# Altium PCB ADCS C2Sv0.1 - Shield.PcbDoc
Units mm, origin at the board's own origin, x right, y up, seen from the top; angles counter-clockwise.
Board outline 76 x 57 mm, 2 copper layers (Top Layer, Bottom Layer), stack 1.57 mm thick; 13 components, 11 nets, 66 pads, 8 vias.
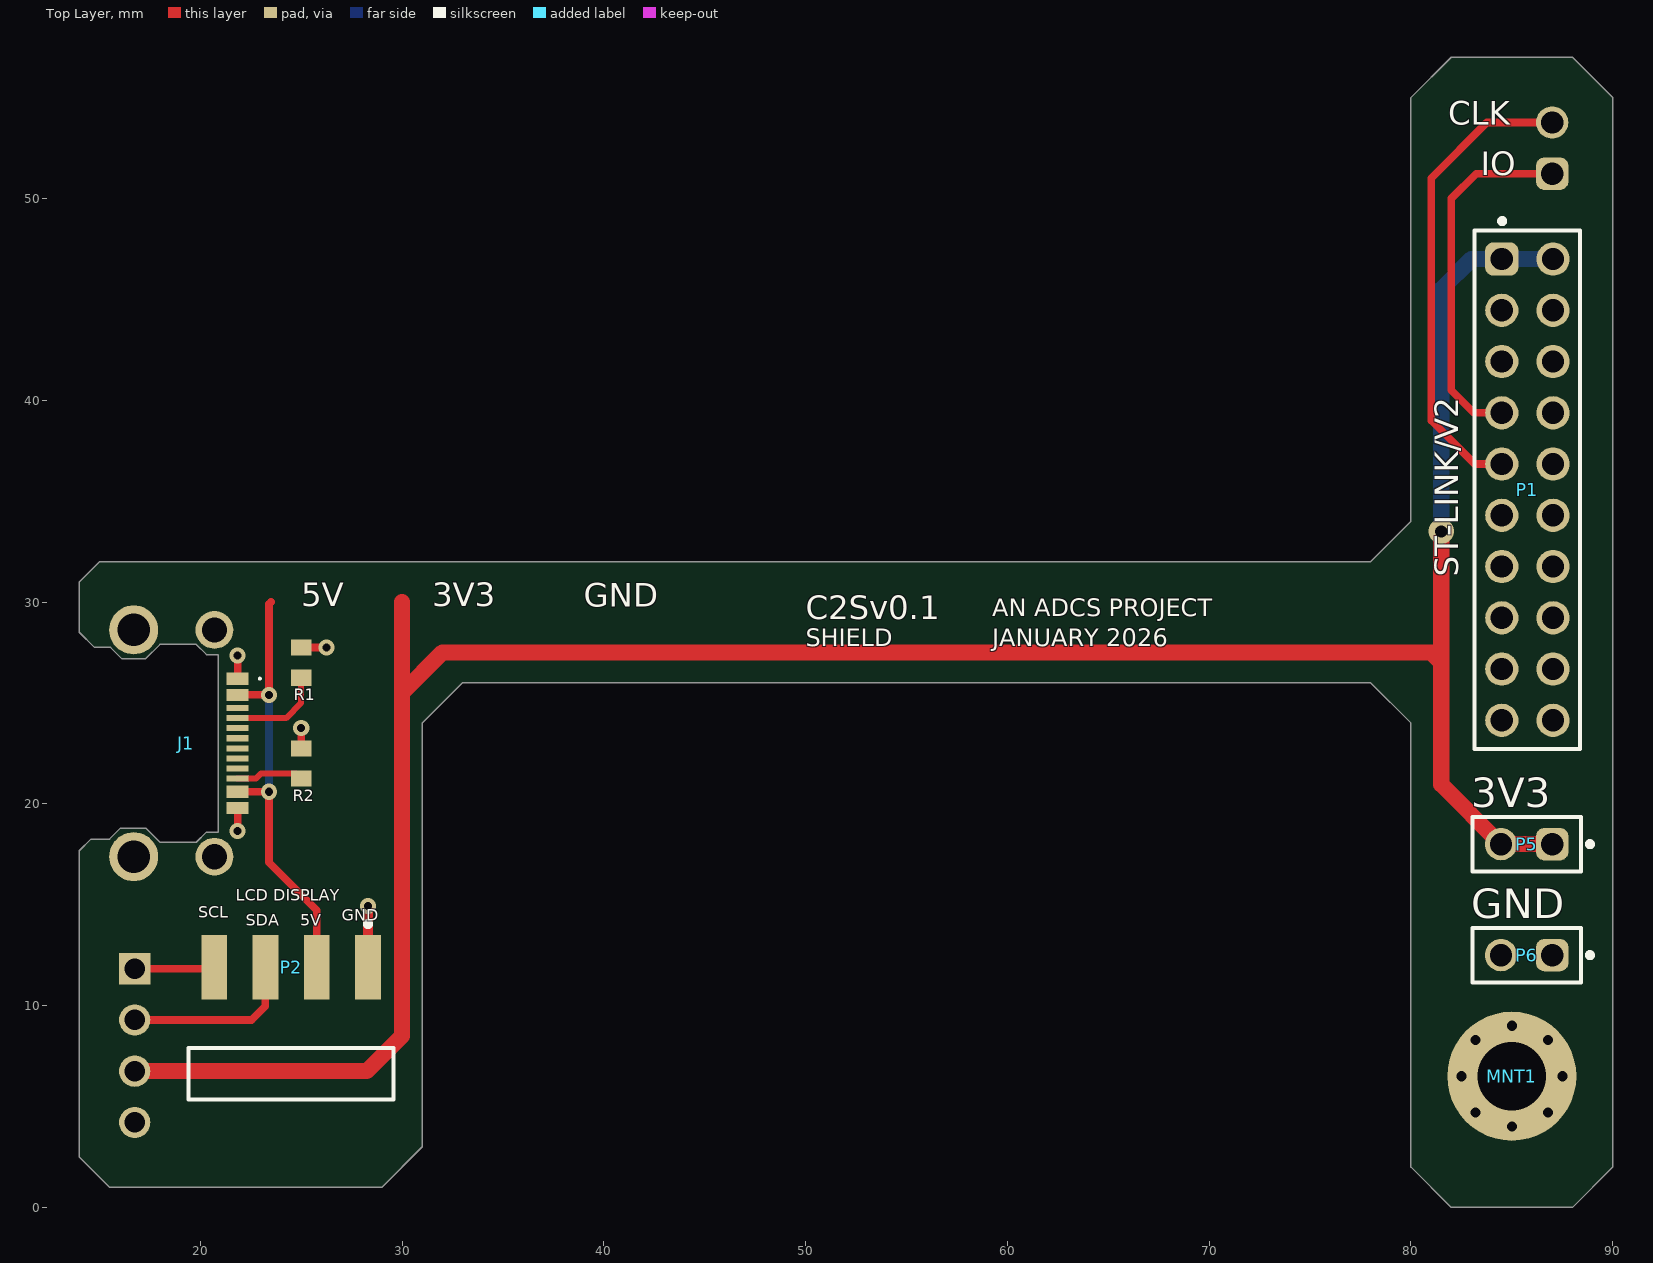
[diagram p0: Top Layer view]
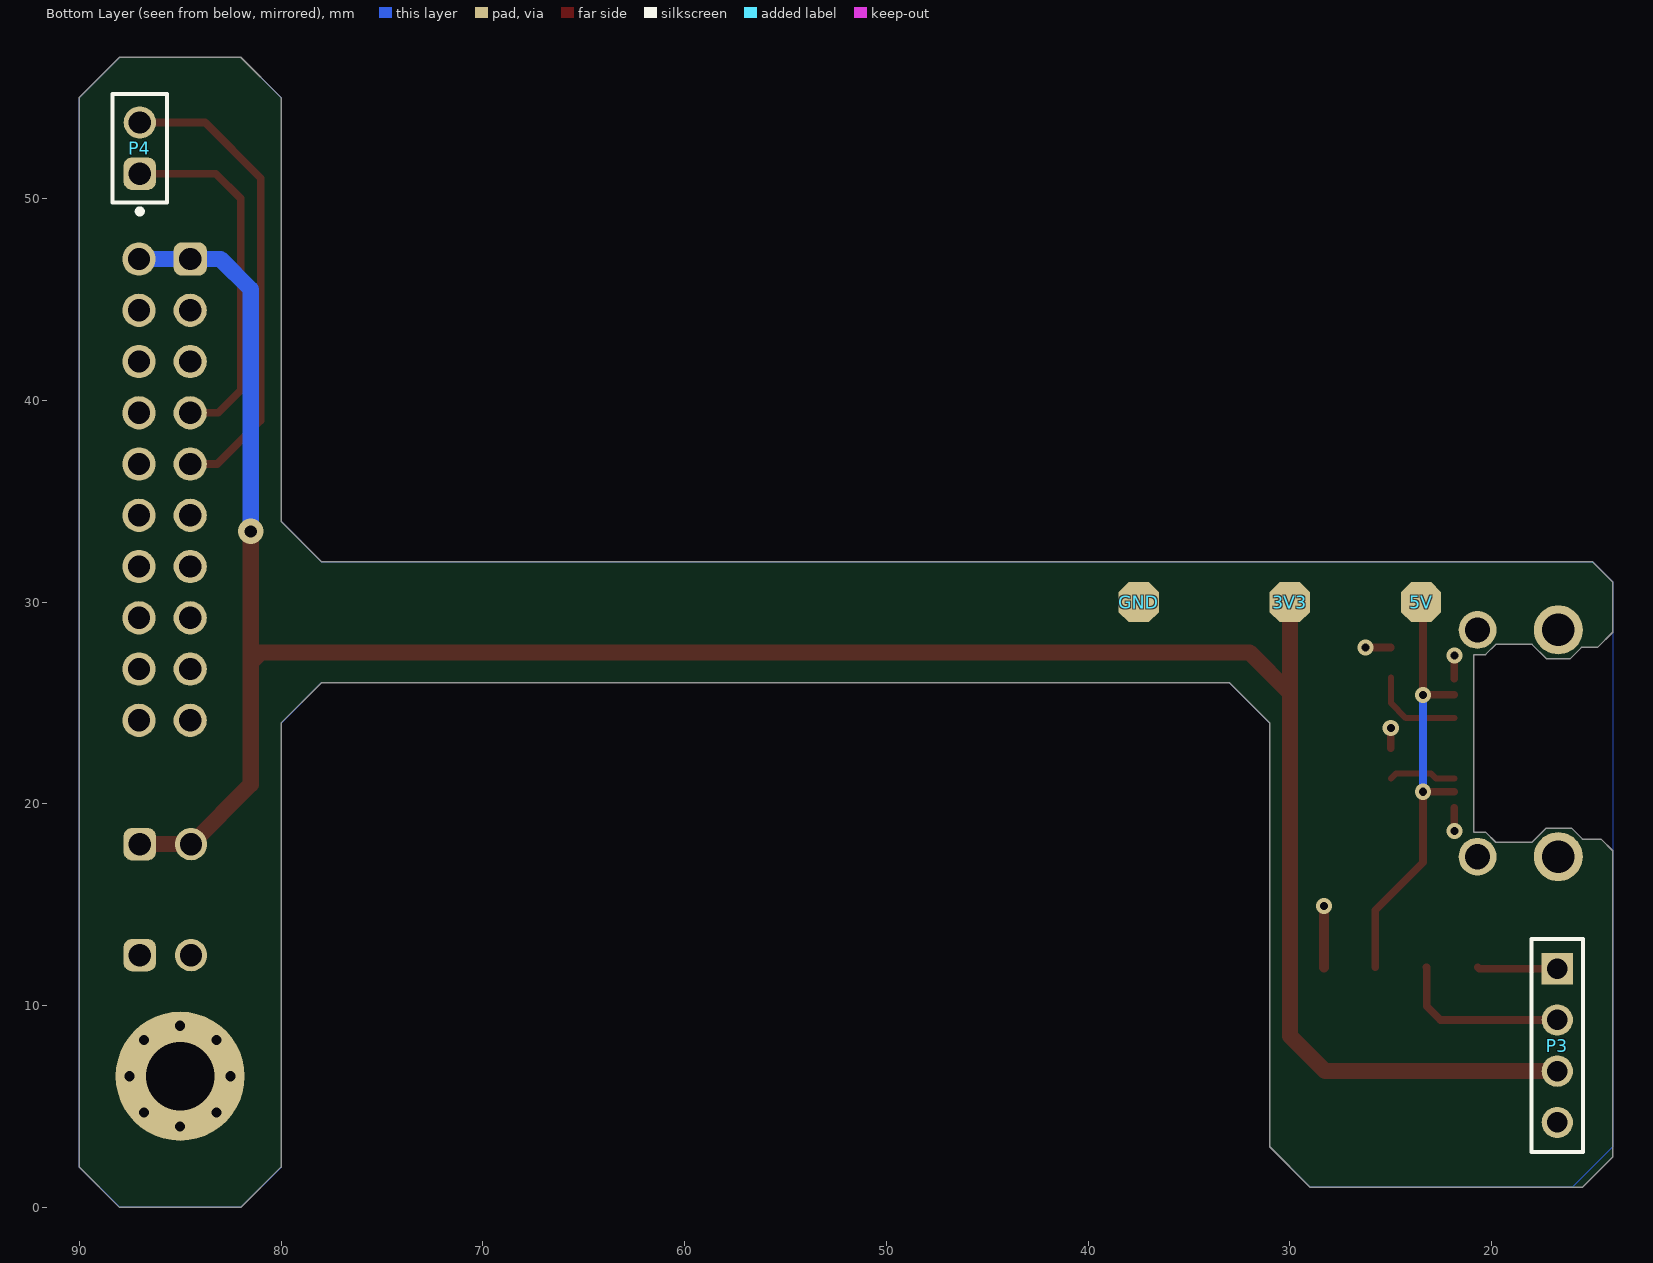
[diagram p1: Bottom Layer view, seen from below]

## Layer stack, top to bottom
Top Solder: solder mask 0.0127, Solder Resist, Dk 3.8
Top Layer: signal copper 0.035
Dielectric: core 1.5, FR-4, Dk 4.5
Bottom Layer: signal copper 0.035
Bottom Solder: solder mask 0.0127, Solder Resist, Dk 3.8

## Board outline
14,17.671 14.579,18.25 15.2,18.25 15.5,18.25 16.05,18.8 17.3,18.8 18,18.1 19.8,18.1 20.3,18.6 20.9,18.6 20.9,27.4 20.3,27.4 19.8,27.9 18,27.9 17.3,27.2 16.1,27.2 15.55,27.75 14.75,27.75 14,28.5 14,31 15,32 78,32 80,34 80,55 82,57 88,57 90,55 90,2 88,0 82,0 80,2 80,24 78,26 33,26 31,24 31,3 29,1 15.5,1 14,2.5

## Design rules (kind name [scope] priority, off if disabled: settings)
AssemblyTestPointUsage [All] p0: scope1count=1 scope1_0_kind=Board scope1_0_value=Board scope2count=1 scope2_0_kind=Board scope2_0_value=Board commentlength=0
AssemblyTestpoint [All] p0: scope1count=1 scope1_0_kind=Board scope1_0_value=Board scope2count=1 scope2_0_kind=Board scope2_0_value=Board commentlength=0
BoardOutlineClearance [All] p0: scope1count=1 scope1_0_kind=Board scope1_0_value=Board scope2count=1 scope2_0_kind=Board scope2_0_value=Board commentlength=0 gap=0.2
BoardOutlineClearance [All] p1: gap=0.2 ignorepadtopadclearanceinfootprint=FALSE
Clearance [All] p0: scope1count=1 scope1_0_kind=Board scope1_0_value=Board scope2count=1 scope2_0_kind=Board scope2_0_value=Board commentlength=0 gap=0.127
Clearance [All] p1: gap=0.127 ignorepadtopadclearanceinfootprint=FALSE except(0.25: Arc-Hole Track-Hole SMDPad-Hole THPad-Hole Via-Hole Fill-Hole Poly-Hole Region-Hole Text-Hole)
ComponentClearance [All] p0: scope1count=1 scope1_0_kind=Board scope1_0_value=Board scope2count=1 scope2_0_kind=Board scope2_0_value=Board commentlength=0 gap=0.127 collisioncheckmode=3
ComponentClearance [All] p1: gap=0.127 collisioncheckmode=3 verticalgap=0.127 showdistances=TRUE
DiffPairsRouting [All] p0: scope1count=1 scope1_0_kind=Board scope1_0_value=Board scope2count=1 scope2_0_kind=Board scope2_0_value=Board commentlength=0
DiffPairsRouting [All] p1: maxlimit=0.254 minlimit=0.127 mostfreqgap=0.127 toplayer_minwidth=0.127 toplayer_maxwidth=25.4 toplayer_prefwidth=0.127 bottomlayer_minwidth=0.127 bottomlayer_maxwidth=25.4 bottomlayer_prefwidth=0.127 maxuncoupledlength=12.7
FabricationTestPointUsage [All] p0: scope1count=1 scope1_0_kind=Board scope1_0_value=Board scope2count=1 scope2_0_kind=Board scope2_0_value=Board commentlength=0 valid=0 allowmultiple=FALSE
FabricationTestpoint [All] p0: scope1count=1 scope1_0_kind=Board scope1_0_value=Board scope2count=1 scope2_0_kind=Board scope2_0_value=Board commentlength=0 side=3 testpointundercomponent=TRUE minsize=1.016 maxsize=2.54 preferedsize=1.524 minholesize=0 maxholesize=1.016 preferedholesize=0.813 testpointgrid=0.025
FanoutControl Fanout_Default [All] p0: scope1count=1 scope1_0_kind=Board scope1_0_value=Board scope2count=1 scope2_0_kind=Board scope2_0_value=Board commentlength=30 // Fanout_Default (Default Rule)
FanoutControl Fanout_Small [All] p0 off: scope1count=1 scope1_0_kind=Board scope1_0_value=Board scope2count=1 scope2_0_kind=Board scope2_0_value=Board commentlength=84 // Protel DXP Scope 1 Expression Was: (CompPinCount < 5)   Fanout_Small (Default Rule)
FanoutControl Fanout_SOIC [All] p0 off: scope1count=1 scope1_0_kind=Board scope1_0_value=Board scope2count=1 scope2_0_kind=Board scope2_0_value=Board commentlength=71 // Protel DXP Scope 1 Expression Was: IsSOIC   Fanout_SOIC (Default Rule)
FanoutControl Fanout_LCC [All] p0 off: scope1count=1 scope1_0_kind=Board scope1_0_value=Board scope2count=1 scope2_0_kind=Board scope2_0_value=Board commentlength=69 // Protel DXP Scope 1 Expression Was: IsLCC   Fanout_LCC (Default Rule)
FanoutControl Fanout_BGA [All] p0 off: scope1count=1 scope1_0_kind=Board scope1_0_value=Board scope2count=1 scope2_0_kind=Board scope2_0_value=Board commentlength=69 // Protel DXP Scope 1 Expression Was: IsBGA   Fanout_BGA (Default Rule)
Height [All] p0: scope1count=1 scope1_0_kind=Board scope1_0_value=Board scope2count=1 scope2_0_kind=Board scope2_0_value=Board commentlength=0
Height [All] p1: minheight=0 maxheight=1816.048 prefheight=12.7
HoleSize [All] p0: scope1count=1 scope1_0_kind=Board scope1_0_value=Board scope2count=1 scope2_0_kind=Board scope2_0_value=Board commentlength=0 absolutevalues=TRUE maxlimit=6.3 minlimit=0.3 maxpercent=80.000 minpercent=20.000
HoleSize [All] p1: absolutevalues=TRUE maxlimit=6.3 minlimit=0.3 maxpercent=80.000 minpercent=20.000
HoleToHoleClearance [All] p0: scope1count=1 scope1_0_kind=Board scope1_0_value=Board scope2count=1 scope2_0_kind=Board scope2_0_value=Board commentlength=0
HoleToHoleClearance [All] p1: gap=0.25 allowstackedmicrovias=FALSE
LayerPairs [All] p0: scope1count=1 scope1_0_kind=Board scope1_0_value=Board scope2count=1 scope2_0_kind=Board scope2_0_value=Board commentlength=0 enforce=TRUE
MinimumAnnularRing [All] p0: scope1count=1 scope1_0_kind=Board scope1_0_value=Board scope2count=1 scope2_0_kind=Board scope2_0_value=Board commentlength=0 minimumring=0.076
MinimumAnnularRing [All] p1: minimumring=0.076
MinimumSolderMaskSliver [All] p0: scope1count=1 scope1_0_kind=Board scope1_0_value=Board scope2count=1 scope2_0_kind=Board scope2_0_value=Board commentlength=0
MinimumSolderMaskSliver [All] p1: minsoldermaskwidth=0
NetAntennae [All] p0: scope1count=1 scope1_0_kind=Board scope1_0_value=Board scope2count=1 scope2_0_kind=Board scope2_0_value=Board commentlength=0
PasteMaskExpansion [All] p0: scope1count=1 scope1_0_kind=Board scope1_0_value=Board scope2count=1 scope2_0_kind=Board scope2_0_value=Board commentlength=0 expansion=0
PlaneClearance [All] p0: scope1count=1 scope1_0_kind=Board scope1_0_value=Board scope2count=1 scope2_0_kind=Board scope2_0_value=Board commentlength=0 clearance=0.127
PlaneClearance [All] p1: clearance=0.127
PlaneConnect [All] p0: scope1count=1 scope1_0_kind=Board scope1_0_value=Board scope2count=1 scope2_0_kind=Board scope2_0_value=Board commentlength=0 planeconnectstyle=Relief reliefexpansion=0.3 reliefentries=4 reliefconductorwidth=0.127 reliefairgap=0.127
PlaneConnect PlaneConnectPowerPads [All] p0: scope1count=1 scope1_0_kind=PadClass scope1_0_value=PowerPads scope2count=1 scope2_0_kind=Board scope2_0_value=Board commentlength=0 planeconnectstyle=Direct reliefexpansion=0.508 reliefentries=4 reliefconductorwidth=0.254 reliefairgap=0.254
PlaneConnect PlaneConnectPowerPads [InPadClass('PowerPads')] p1: planeconnectstyle=Direct reliefexpansion=0.508 reliefentries=4 reliefconductorwidth=0.254 reliefairgap=0.254
PlaneConnect [All] p2: pad.planeconnectstyle=Relief pad.reliefexpansion=0.3 pad.reliefentries=4 pad.reliefconductorwidth=0.127 pad.reliefairgap=0.127 via.planeconnectstyle=Direct via.reliefexpansion=0.3 via.reliefentries=4 via.reliefconductorwidth=0.127 via.reliefairgap=0.127
PolygonConnect [All] p0: scope1count=1 scope1_0_kind=Board scope1_0_value=Board scope2count=1 scope2_0_kind=Board scope2_0_value=Board commentlength=0 connectstyle=Relief reliefconductorwidth=0.127 reliefentries=4 polygonreliefangle="90 Angle"
PolygonConnect PolygonConnectPowerPads [All] p0 off: scope1count=1 scope1_0_kind=Board scope1_0_value=Board scope2count=1 scope2_0_kind=Board scope2_0_value=Board commentlength=64 connectstyle=Direct reliefconductorwidth=0.254 reliefentries=4 polygonreliefangle="90 Angle" // Protel DXP Scope 2 Expression Was: (InPadClass('PowerPads'))
PolygonConnect PolygonConnectPowerPads [All vs (InPadClass('PowerPads'))] p1: connectstyle=Direct reliefconductorwidth=0.254 reliefentries=4 polygonreliefangle="90 Angle" airgapwidth=0.254
PolygonConnect [All] p2: thpad.connectstyle=Relief thpad.reliefconductorwidth=0.127 thpad.reliefentries=4 thpad.polygonreliefangle="90 Angle" thpad.airgapwidth=0.127 smdpad.connectstyle=Relief smdpad.reliefconductorwidth=0.127 smdpad.reliefentries=4 smdpad.polygonreliefangle="90 Angle" smdpad.airgapwidth=0.127 via.connectstyle=Direct via.reliefconductorwidth=0.127 via.reliefentries=4 via.polygonreliefangle="90 Angle" via.airgapwidth=0.127
RoutingCorners [All] p0: scope1count=1 scope1_0_kind=Board scope1_0_value=Board scope2count=1 scope2_0_kind=Board scope2_0_value=Board commentlength=0 cornerstyle=45-Degree minsetback=2.54 maxsetback=2.54
RoutingLayers [All] p0: scope1count=1 scope1_0_kind=Board scope1_0_value=Board scope2count=1 scope2_0_kind=Board scope2_0_value=Board commentlength=0 top layer=Automatic bottom layer=Automatic
RoutingPriority [All] p0: scope1count=1 scope1_0_kind=Board scope1_0_value=Board scope2count=1 scope2_0_kind=Board scope2_0_value=Board commentlength=0
RoutingTopology [All] p0: scope1count=1 scope1_0_kind=Board scope1_0_value=Board scope2count=1 scope2_0_kind=Board scope2_0_value=Board commentlength=0 topology=Shortest
RoutingVias [All] p0: scope1count=1 scope1_0_kind=Board scope1_0_value=Board scope2count=1 scope2_0_kind=Board scope2_0_value=Board commentlength=0 holewidth=0.3 width=0.6 viastyle="Through Hole" minholewidth=0.3 minwidth=0.6 maxholewidth=0.6 maxwidth=6.6
RoutingVias [All] p1: holewidth=0.3 width=0.6 viastyle="Through Hole" minholewidth=0.3 minwidth=0.6 maxholewidth=0.6 maxwidth=6.6
ShortCircuit [All] p0: scope1count=1 scope1_0_kind=Board scope1_0_value=Board scope2count=1 scope2_0_kind=Board scope2_0_value=Board commentlength=0 allowed=FALSE
SilkToBoardRegionClearance [All] p0: scope1count=1 scope1_0_kind=Board scope1_0_value=Board scope2count=1 scope2_0_kind=Board scope2_0_value=Board commentlength=0
SilkToSilkClearance [All] p0: scope1count=1 scope1_0_kind=Board scope1_0_value=Board scope2count=1 scope2_0_kind=Board scope2_0_value=Board commentlength=0
SilkToSilkClearance [All] p1: silktosilkclearance=0
SilkToSolderMaskClearance [All] p0 off: scope1count=1 scope1_0_kind=Board scope1_0_value=Board scope2count=1 scope2_0_kind=Board scope2_0_value=Board commentlength=44 // Protel DXP Scope 1 Expression Was: IsPad
SilkToSolderMaskClearance [IsPad] p1: minsilkscreentomaskgap=0.127 clearancetoexposedcopper=TRUE
SolderMaskExpansion SME_Via [All] p0 off: scope1count=1 scope1_0_kind=Board scope1_0_value=Board scope2count=1 scope2_0_kind=Board scope2_0_value=Board commentlength=44 expansion=0.102 // Protel DXP Scope 1 Expression Was: IsVia
SolderMaskExpansion [All] p0: scope1count=1 scope1_0_kind=Board scope1_0_value=Board scope2count=1 scope2_0_kind=Board scope2_0_value=Board commentlength=0 expansion=0.075
SolderMaskExpansion SME_Via [IsVia] p1: expansion=0.102 istentingtop=TRUE
SolderMaskExpansion [All] p2: expansion=0.075 istentingtop=FALSE
SupplyNets "Schematic Supply Nets_3" [All] p0: scope1count=1 scope1_0_kind=Net scope1_0_value=3V3 scope2count=1 scope2_0_kind=Board scope2_0_value=Board commentlength=0 voltage=0.000
SupplyNets "Schematic Supply Nets_1" [All] p0: scope1count=1 scope1_0_kind=Net scope1_0_value=GND scope2count=1 scope2_0_kind=Board scope2_0_value=Board commentlength=0 voltage=0.000
SupplyNets "Schematic Supply Nets" [All] p0: scope1count=1 scope1_0_kind=Net scope1_0_value=5V scope2count=1 scope2_0_kind=Board scope2_0_value=Board commentlength=0 voltage=0.000
SupplyNets "Schematic Supply Nets_3" [InNet('3V3')] p1: voltage=0.000
SupplyNets "Schematic Supply Nets_1" [InNet('GND')] p2: voltage=0.000
SupplyNets "Schematic Supply Nets" [InNet('5V')] p3: voltage=0.000
UnRoutedNet [All] p0: scope1count=1 scope1_0_kind=Board scope1_0_value=Board scope2count=1 scope2_0_kind=Board scope2_0_value=Board commentlength=0
UnpouredPolygon [All] p0: scope1count=1 scope1_0_kind=Board scope1_0_value=Board scope2count=1 scope2_0_kind=Board scope2_0_value=Board commentlength=0
Width [All] p0: scope1count=1 scope1_0_kind=Board scope1_0_value=Board scope2count=1 scope2_0_kind=Board scope2_0_value=Board commentlength=0 maxlimit=25.4 minlimit=0.127 preferedwidth=0.127
Width [All] p1: maxlimit=25.4 minlimit=0.127 preferedwidth=0.127 minimp=50.000000 maximp=50.000000 favimp=50.000000
20 further rules are at their usual default settings.

## Components (designator, comment, footprint, x,y, rotation, side; value= is the part's Value field where it differs from the comment)
3V3 "TP_2MM" "TESTPOINT 2MM" 30,30 r0 top
5V "TP_2MM" "TESTPOINT 2MM" 23.5,30 r0 top
GND "TP_2MM" "TESTPOINT 2MM" 37.5,30 r0 top
J1 "USB C Connector" UJ20CHGMSMT2P16TR 19.5,23 r270 top locked
MNT1 "M3 Mount" M3_Mount-Footprint-1 85,6.5 r0 top locked
P1 "61302021121" 61302021121 85.77,35.57 r270 top
P2 "TSM-104-01-T-SH" SMTC-TSM-104-01-X-SH 24.5,6.5 r180 top
P3 "" SMTC-MTSW-104-07-X-S-170 16.75,11.83 r270 bottom locked
P4 "61300211121" 61300211121 87,52.5 r90 bottom locked
P5 "61300211121" 61300211121 85.73,18 r180 top
P6 "61300211121" 61300211121 85.73,12.5 r180 top
R1 "Resistor 10k +/-1% 0603 100mW" RESC1608X55X25ML10T15-1 25,27 r90 top
R2 "Resistor 10k +/-1% 0603 100mW" RESC1608X55X25ML10T15-1 25,22 r90 top

## Footprints (in the part's own frame and the unit in brackets; to place one, negate y for a bottom-side part, rotate by r counter-clockwise, add the part's x,y. Pads: shape width x height; smd on the part's side, far side on the other; paste and mask are expansions set on the pad)
61300211121 [mm] "Pin Header, pitch 2.54 mm, THT, Vertical, single row, 2p"
  rrect50% 1.6x1.6 hole 1.1: 1(-1.27,0)
  round 1.6 hole 1.1: 2(1.27,0)
  silkscreen extent -3.26,-1.35 2.69,1.35
61302021121 [mm] "Pin Header, pitch 2.54 mm, THT, Vertical, dual row, 20p"
  rrect50% 1.65x1.65 hole 1.1: 1(-11.43,-1.27)
  round 1.65 hole 1.1: 2(-11.43,1.27) 3(-8.89,-1.27) 4(-8.89,1.27) 5(-6.35,-1.27) 6(-6.35,1.27) 7(-3.81,-1.27) 8(-3.81,1.27) 9(-1.27,-1.27) 10(-1.27,1.27) 11(1.27,-1.27) 12(1.27,1.27) 13(3.81,-1.27) 14(3.81,1.27) 15(6.35,-1.27) 16(6.35,1.27) 17(8.89,-1.27) 18(8.89,1.27) 19(11.43,-1.27) 20(11.43,1.27)
  silkscreen extent -13.43,-2.62 12.85,2.62
M3_Mount-Footprint-1 [mm]
  round 0.8 hole 0.5: 1(-2.5,0) 1(-1.8,-1.8) 1(-1.8,1.8) 1(0,-2.5) 1(0,2.5) 1(1.8,-1.8) 1(1.8,1.8) 1(2.5,0)
  round 6.4 hole 3.4: 1(0,0)
RESC1608X55X25ML10T15-1 [mm] "Chip Resistor, 2-Leads, Body 1.70x0.90mm, IPC Low Density"
  rect 0.8x1 smd: 1(-0.75,0) 2(0.75,0)
SMTC-MTSW-104-07-X-S-170 [mm] "Assembly .025\" [.64] SQ Post Terminal Strip, 1x4 Pins, Vertical, 2.54mm Pitch, Male"
  rect 1.55x1.55 hole 1.02: 1(0,0)
  round 1.55 hole 1.02: 2(2.54,0) 3(5.08,0) 4(7.62,0)
  silkscreen extent -1.46,-1.27 9.08,1.27
SMTC-TSM-104-01-X-SH [mm] "Terminal Strip Single Surface Mount, 1x4 Pins, Horizontal, 2.54mm Pitch, Male"
  rect 1.27x3.18 smd: 1(-3.81,-5.402) 2(-1.27,-5.402) 3(1.27,-5.402) 4(3.81,-5.402)
  silkscreen extent -5.08,-7.67 5.08,1.15
"TESTPOINT 2MM" [mm]
  oct 2x2 smd far side mask+0.075: " "(0,0)
UJ20CHGMSMT2P16TR [mm]
  rect 0.6x1.1 smd: A1(-3.2,2.35) A4(-2.4,2.35) B1(3.2,2.35) B4(2.4,2.35)
  rect 0.3x1.1 smd: A5(-1.25,2.35) A6(-0.25,2.35) A7(0.25,2.35) A8(1.25,2.35) B5(1.75,2.35) B6(0.75,2.35) B7(-0.75,2.35) B8(-1.75,2.35)
  round 1.875 hole 1.25: MH1(-5.62,1.2) MH2(5.62,1.2)
  round 2.43 hole 1.62: MH3(-5.62,-2.8) MH4(5.62,-2.8)
  silkscreen extent -3.25,3.4 -3.15,3.5

## Part data
J1: library part CMP-026-000123-2, "UJ20-C-H-G-MSMT-2-P16-TR Connector"
MNT1: library part CMP-002-00124-2, "M3 mounting hole"
P1: library part CMP-1502-01104-4, "THT Vertical Pin Header WR-PHD, Pitch 2.54 mm, Dual Row, 20 pins"
P2: library part CMP-1024-00223-1, "0.025\" SQ Post Header, Surface Mount, Horizontal, -55 to 105 degC, 2.54 mm Pitch, 4-Pin, Male, RoHS"
P3: library part CMP-1024-00105-1, "Modified .025\" SQ Post Header, Through-hole, Vertical, -55 to 105 degC, 2.54 mm Pitch, 4-Pin, Male, RoHS"
P4 P5 P6: library part CMP-096-000133-1, "WR-PHD Pin Header, THT, Vertical, pitch 2.54mm, 1 Row, 2P"
R1 R2: library part CMP-009-00181-1, "Chip Resistor, 10k Ohm, 0.1 W, -55 to 155 degC, 0603 (1608 Metric)"

## Via types
v1: diameter 0.8, hole 0.4, Top Layer to Bottom Layer, tented both sides, 7 vias
v2: diameter 1.27, hole 0.6, Top Layer to Bottom Layer, tented both sides, 1 vias

## Nets (pads, with @x,y where several pads share a name; then routed paths per layer and width w, separated by ;. In a path a pad name is that pad's centre, name@x,y a point inside that pad or via, vN(x,y) a via of type N, cw(c..) or ccw(c..) an arc to the next point about the centre after c; other vN are vias at no path point)
3V3: "3V3. " P1.1 P1.2 P3.3 P5.1 P5.2 | length 125.4
  Top Layer w0.8: P3.3 28.25,6.75 30,8.5 30,25.5 ; 30,30 30,25.5 ; v2(81.5,33.5) 81.5,27 ; P5.1 P5.2 81.5,20.96 81.5,27 ; 30,25.5 32,27.5 81,27.5 81.5,27
  Bottom Layer w0.8: v2(81.5,33.5) 81.5,45.5 83,47 P1.1 P1.2
5V: "5V. " J1.A4 J1.B4 P2.2 | length 22.2
  Top Layer w0.381: J1.B4 v1(23.4,20.6) 23.4,17.1 25.77,14.73 P2.2 ; J1.A4 v1(23.4,25.4) 23.4,29.9 23.5,30
  Bottom Layer w0.381: v1(23.4,20.6) v1(23.4,25.4)
CLK: P1.9 P4.2 | length 23.5
  Top Layer w0.381: P1.9 83.16,36.84 81,39 81,51 83.77,53.77 P4.2
GND: "GND. " J1.A1 J1.B1 P1.3 P1.4 P1.5 P1.6 P1.8 P1.10 P1.12 P1.14 P1.16 P1.18 P1.20 P2.1 P3.4 P6.1 P6.2 R1.2 R2.2 | length 7.6
  Top Layer w0.381: v1(21.85,18.65) J1.B1 ; J1.A1 v1(21.85,27.35) ; R2.2 v1(25,23.75) ; R1.2 v1(26.25,27.75)
  Top Layer w0.5: P2.1 v1(28.31,14.94)
IO: P1.7 P4.1 | length 18
  Top Layer w0.381: P1.7 83.12,39.38 82,40.5 82,50 83.23,51.23 P4.1
LCD_SCL: P2.4 P3.1 | length 4
  Top Layer w0.381: P3.1 20.618,11.83 P2.4
LCD_SDA: P2.3 P3.2 | length 8.7
  Top Layer w0.381: P3.2 22.54,9.29 23.214,9.964 23.214,11.886 P2.3
NRST: P1.15
TRACE: P1.13
USB_CC1: J1.A5 R1.1 | length 4.7
  Top Layer w0.3: J1.A5 24.25,24.25 25,25 R1.1
USB_CC2: J1.B5 R2.1 | length 3.4
  Top Layer w0.3: J1.B5 22.75,21.25 23,21.5 24.75,21.5 R2.1
pads on no net: J1.A6 J1.A7 J1.A8 J1.B6 J1.B7 J1.B8 J1.MH1 J1.MH2 J1.MH3 J1.MH4 MNT1.1 P1.11 P1.17 P1.19

## Polygon pours and split planes (outlines as drawn)
GND on Bottom Layer "NONET_L-01_P-001" (solid, pour order 0): 80,34 78,32 25,32 15,32 14,31 14,3 16,1 29,1 31,3 31,24 33,26 78,26 80,24 80,2 82,0 88,0 90,2 90,55 88,57 82,57 80,55

## Silkscreen, mask and mechanical layers (free items; w line width, h text height)
Top Overlay:
  text "CLK" at 81.841,53.267 h2
  text "IO" at 83.451,50.767 h2
  text "ST-LINK/V2" at 82.733,31.25 h2 r90
  text "AN ADCS PROJECT" at 59.25,29 h1.5
  text "C2Sv0.1" at 50,28.75 h2
  text "SHIELD" at 50,27.5 h1.5
  text "JANUARY 2026" at 59.25,27.5 h1.5
  text "3V3" at 82.98,19.345 h2.5
  text "LCD DISPLAY" at 21.75,15 h1
  text "SCL" at 19.9,14.158 h1
  text "GND" at 27,14 h1
  text "GND" at 82.98,13.845 h2.5
  text "SDA" at 22.25,13.75 h1
  text "5V" at 24.949,13.75 h1
Board Shape:
  lines w0.1: 78,26 80,24 80,21 80,2 82,0 83,0 88,0 90,2 90,55 88,57 85,57 83,57 82,57 80,55 80,34 78,32 15,32 14,31 14,28.5 14.75,27.75 15.2,27.75 15.55,27.75 16.1,27.2 17.3,27.2 18,27.9 19.8,27.9 20.3,27.4 20.9,27.4 20.9,18.6 20.3,18.6 19.8,18.1 18,18.1 17.3,18.8 16.05,18.8 15.5,18.25 15.2,18.25 14.579,18.25 14,17.671 14,16.104 14,2.5 15.5,1 21,1 25,1 26,1 29,1 31,3 31,18 31,24 33,26 78,26 ; 78,26 78,26 ; 83,48 83,48

## Text inside footprints (layer, text, board x,y; h text height)
R2: Top Assembly "MTSW-104-07-T-S-170" at 18.007,-2.331 h1.52